# Altium PCB PCB1.PcbDoc
Units mil, origin at the board's own origin, x right, y up, seen from the top; angles counter-clockwise.
Board outline 3470 x 1475 mil, 2 copper layers (Top Layer, Bottom Layer); 8 components, 7 nets, 17 pads, 0 vias.
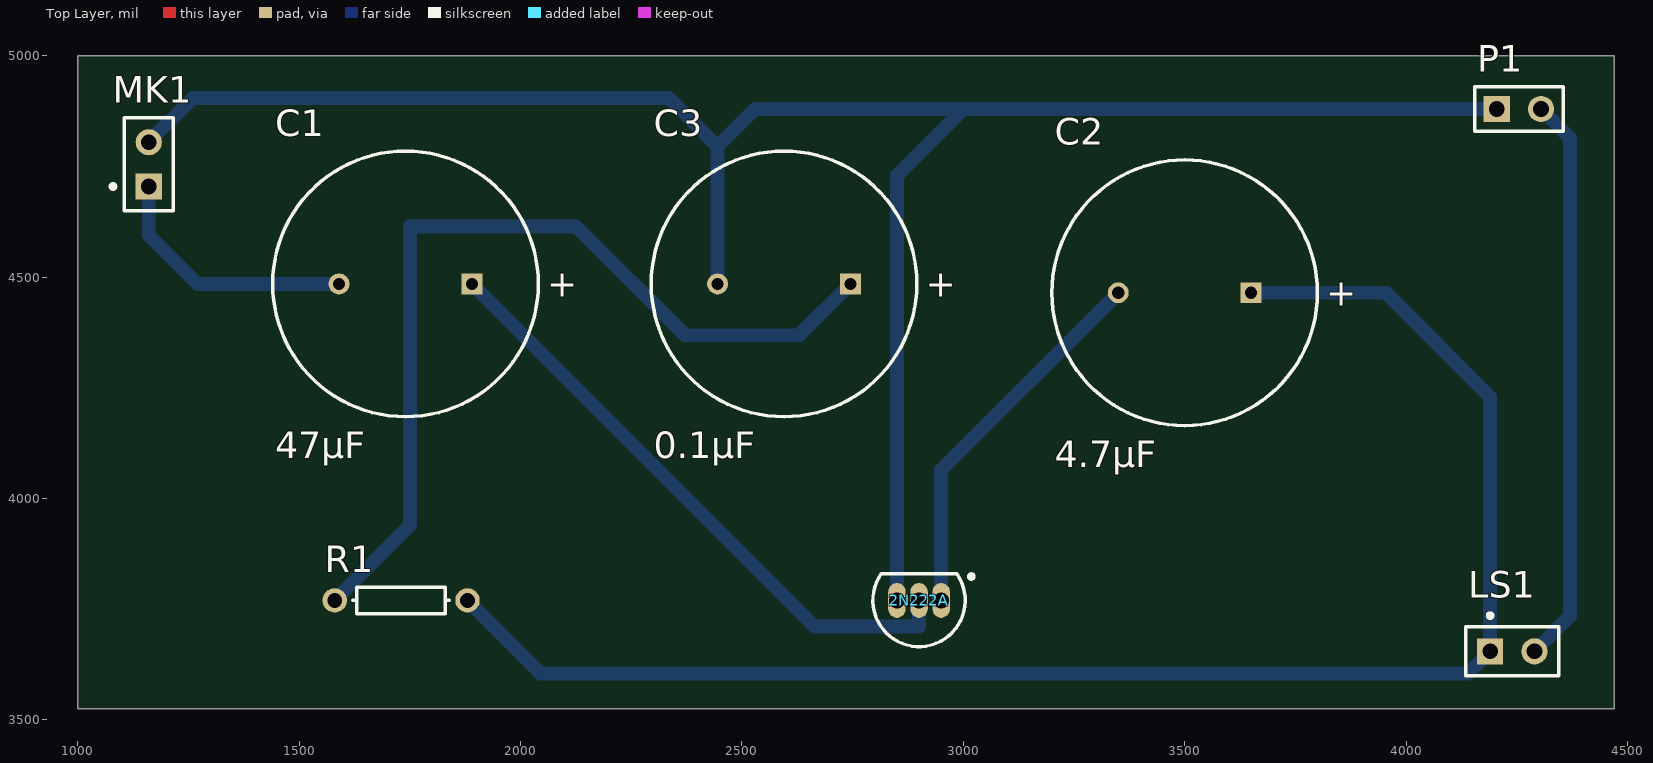
[diagram p0: Top Layer view]
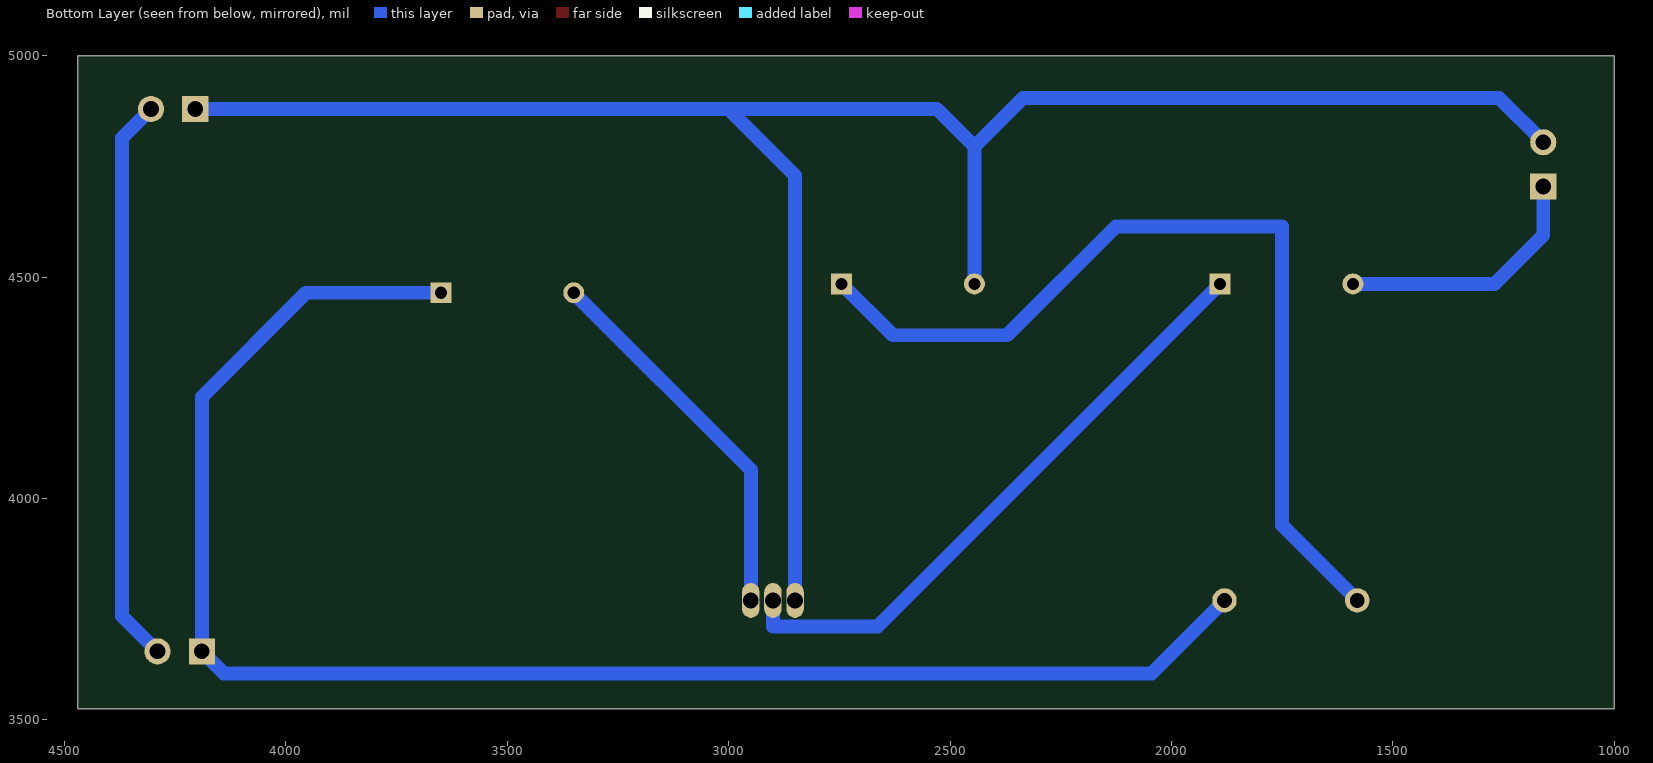
[diagram p1: Bottom Layer view, seen from below]

## Layer stack, top to bottom
Top Solder: solder mask 0.4, Solder Resist, Dk 3.5
Top Layer: signal copper 1.4
Dielectric 1: dielectric 12.6, FR-4, Dk 4.8
Bottom Layer: signal copper 1.4
Bottom Solder: solder mask 0.4, Solder Resist, Dk 3.5

## Board outline
1000,3525 4470,3525 4470,5000 1000,5000

## Design rules (kind name [scope] priority, off if disabled: settings)
Clearance [All] p1: gap=0.7 ignorepadtopadclearanceinfootprint=FALSE
PolygonConnect [All] p1: connectstyle=Direct reliefconductorwidth=10 reliefentries=4 polygonreliefangle="90 Angle" airgapwidth=10
RoutingLayers [All] p1: top layer_v5=FALSE bottom layer_v5=TRUE
RoutingVias [All] p1: holewidth=28 width=50 viastyle="Through Hole" minholewidth=28 minwidth=50 maxholewidth=28 maxwidth=50
SolderMaskExpansion [All] p1: expansion=4
Width [All] p1: maxlimit=39.37 minlimit=27.56 preferedwidth=31.5
29 further rules are at their usual default settings.

## Components (designator, comment, footprint, x,y, rotation, side; value= is the part's Value field where it differs from the comment)
2N222A "NPN" TO-226-AA 2900,3770 r90 top
C1 "47μF" RB7.6-15 1740,4485 r0 top value=100pF
C2 "4.7μF" RB7.6-15 3500,4465 r0 top value=100pF
C3 "0.1μF" RB7.6-15 2595,4485 r0 top value=100pF
LS1 "Speaker" PIN2 4190,3655 r0 top
MK1 "Mic1" PIN2 1160,4705 r90 top
P1 "Rosseta" HDR1X2 4205,4880 r0 top
R1 "1K" AXIAL-0.3 1730,3770 r180 top

## Footprints (in the part's own frame and the unit in brackets; to place one, negate y for a bottom-side part, rotate by r counter-clockwise, add the part's x,y. Pads: shape width x height; smd on the part's side, far side on the other; paste and mask are expansions set on the pad)
AXIAL-0.3 [mm] "Axial Device, Thru-Hole; 2 Leads; 0.3 in Pin Spacing"
  round 1.4 hole 0.85: 1(-3.81,0) 2(3.81,0)
  silkscreen extent -2.77,-0.76 2.77,0.76
HDR1X2 [mm] "Connector; Header; 2 Position"
  rect 1.5x1.5 hole 0.9: 1(0,0)
  round 1.5 hole 0.9: 2(2.54,0)
  silkscreen extent -1.27,-1.27 3.81,1.27
PIN2 [mm] "Photosensitive Diode; 2 Leads"
  rect 1.5x1.5 hole 0.9: 1(0,0)
  round 1.5 hole 0.9: 2(2.54,0)
  silkscreen extent -1.4,-1.4 3.94,2.17
RB7.6-15 [mm] "Polarized Capacitor (Radial); 2 Leads"
  rect 1.2x1.2 hole 0.7: 1(3.81,0)
  round 1.2 hole 0.7: 2(-3.81,0)
  silkscreen extent -7.62,-7.62 7.62,7.62
TO-226-AA [mm] "TO, Flat Index; 3 In-Line, Axial Leads; Body Dia. 4.8mm; Leads 0.55 x 0.51 mm (max)"
  oval 2x1 hole 0.9: 1(0,-1.27) 2(0,0) 3(0,1.27)
  silkscreen extent -2.65,-3.13 1.52,2.65, body extent -2.65,-2.66 1.52,2.66, height 5.33

## Part data
2N222A: "NPN Bipolar Transistor", Code_JEDEC=TO-226-AA, LatestRevisionDate=17-Jul-2002, LatestRevisionNote="Re-released for DXP Platform.", PackageDescription="TO, Flat Index; 3 In-Line, Axial Leads; Body Dia. 4.8mm; Leads 0.55 x 0.51 mm (max)", PackageReference=TO-226-AA, Published=8-Jun-2000, Publisher="Altium Limited"
C1 C2 C3: library part "Cap Pol1", "Polarized Capacitor (Radial)", LatestRevisionDate=17-Jul-2002, LatestRevisionNote="Re-released for DXP Platform.", PackageDescription="Polarized Capacitor (Radial); 2 Leads", PackageReference=RB7.6-15, Published=8-Jun-2000, Publisher="Altium Limited"
LS1: "Loudspeaker", LatestRevisionDate=17-Jul-2002, LatestRevisionNote="Re-released for DXP Platform.", PackageReference=PIN2, Published=24-Mar-1999, Publisher="Altium Limited"
MK1: "Microphone", LatestRevisionDate=17-Jul-2002, LatestRevisionNote="Re-released for DXP Platform.", PackageReference=PIN2, Published=24-Mar-1999, Publisher="Altium Limited"
P1: library part "Header 2", "Header, 2-Pin", LatestRevisionDate=17-Jul-2002, LatestRevisionNote="Re-released for DXP Platform.", Publisher="Altium Limited"
R1: library part Res1, "Resistor", LatestRevisionDate=17-Jul-2002, LatestRevisionNote="Re-released for DXP Platform.", PackageDescription="Axial Device, Thru-Hole; 2 Leads; 0.3 in Pin Spacing", PackageReference=AXIAL-0.3, Published=8-Jun-2000, Publisher="Altium Limited"

## Nets (pads, with @x,y where several pads share a name; then routed paths per layer and width w, separated by ;. In a path a pad name is that pad's centre, name@x,y a point inside that pad or via, vN(x,y) a via of type N, cw(c..) or ccw(c..) an arc to the next point about the centre after c; other vN are vias at no path point)
9V: LS1.2 P1.2 | length 1285.1
  Bottom Layer w31.5: LS1.2 4370,3735 4370,4815 P1.2
GND: 2N222A.3 C3.2 MK1.2 P1.1 | length 4649.3
  Bottom Layer w31.5: MK1.2 1260,4905 2335,4905 2445,4795 ; C3.2 2445,4795 ; 2N222A.3 2850,4730 3000,4880 ; P1.1 3000,4880 ; 2445,4795 2530,4880 3000,4880
Net2N222A_1: 2N222A.1 C2.2 | length 860.7
  Bottom Layer w31.5: 2N222A.1 2950,4065 C2.2
Net2N222A_2: 2N222A.2 C1.1 | length 1389.6
  Bottom Layer w31.5: C1.1 2664,3711 2900,3711 2N222A.2
NetC1_2: C1.2 MK1.1 | length 585.6
  Bottom Layer w31.5: MK1.1 1160,4595 1270,4485 C1.2
NetC2_1: C2.1 LS1.1 R1.1 | length 3611.4
  Bottom Layer w31.5: R1.1 2045,3605 4140,3605 LS1.1 4190,4230 3955,4465 C2.1
NetC3_1: C3.1 R1.2 | length 2060.4
  Bottom Layer w31.5: R1.2 1750,3940 1750,4615 2125,4615 2371,4369 2629,4369 C3.1

## Text inside footprints (layer, text, board x,y; h text height)
C1: Top Overlay "+" at 2060.15,4455.99 h59.06
C2: Top Overlay "+" at 3820.15,4435.99 h59.06
C3: Top Overlay "+" at 2915.15,4455.99 h59.06